# Allegro board Desulfator_new.brd
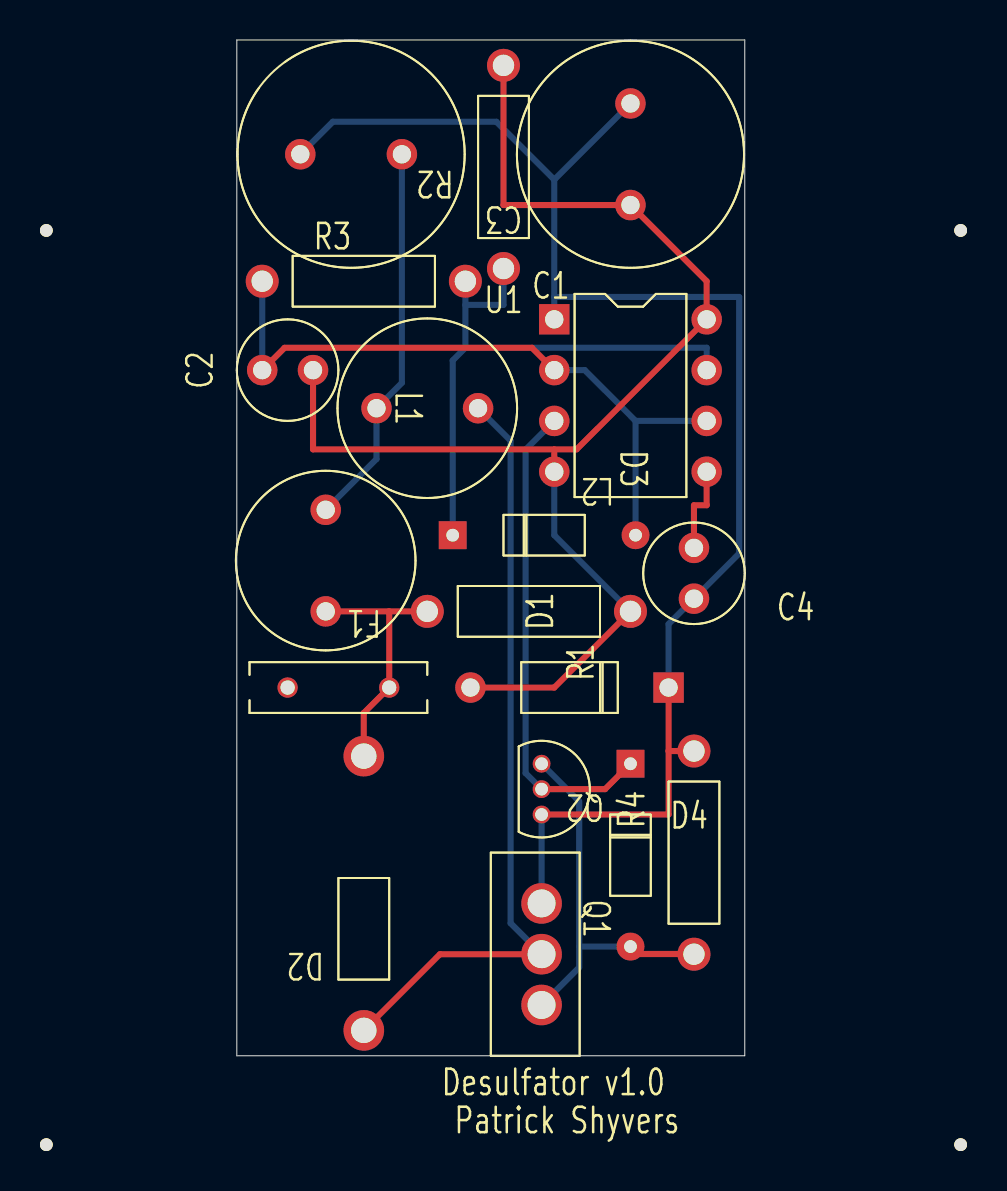
[diagram p0: board, top side]
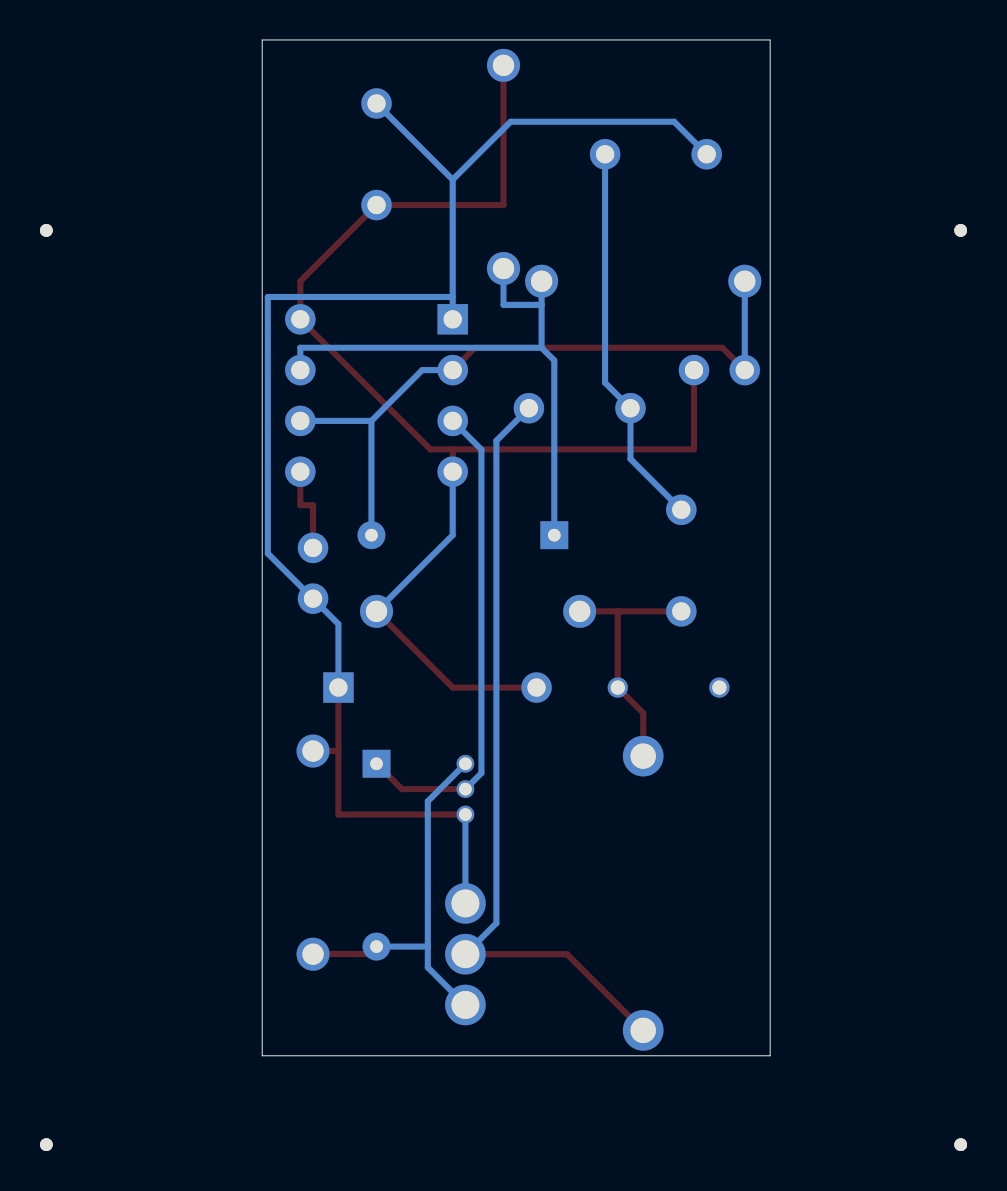
[diagram p1: board, bottom side, seen from below]

Outline 25.4 x 50.8 mm; copper layers: TOP, BOTTOM. Coordinates in mm from the lower left corner of the outline.
Outline path: 0,50.8 0,0 25.4,0 25.4,50.8 0,50.8

## Placement (name value [footprint] x y rotation side)
C1  100uF  [ELECTROLYTIC400]  19.69 42.55 90 top
C2  .0047uF  [CAP196]  3.81 34.29 90 top
C3  100uF  [ELECTROLYTIC400]  8.25 45.08 180 top
C4  0.01uF  [CAP196]  22.86 25.4 180 top
D1  1N4744  [DO41]  21.59 18.41 90 top
D2  FR602  [R6]  6.35 1.27 0 top
D3  1N4148  [DO35]  10.79 26.03 270 top
D4  1N4148  [DO35]  19.69 14.6 180 top
F1  2A  [FUSE200]  8.89 18.41 180 top
L1  1000uH  [IND335]  4.44 27.31 270 top
L2  220uH  [IND335]  12.06 32.38 180 top
NOREF  -  [unnamed]  -9.53 41.27 180 bottom
NOREF#2  -  [unnamed]  36.19 -4.44 180 bottom
NOREF#3  -  [unnamed]  36.19 41.27 180 bottom
NOREF#4  -  [unnamed]  -9.53 -4.44 180 bottom
Q1  IRFZ44N/TO  [TO220AB]  15.24 2.54 270 top
Q2  2N2907  [TO92]  15.24 14.6 0 top
R1  100  [RES400]  19.69 22.22 90 top
R2  15k  [RES400]  13.33 49.53 180 top
R3  270k  [RES400]  11.43 38.74 90 top
R4  15k  [RES400]  22.86 5.08 0 top
U1  NE555/SO  [DIP8_3]  15.88 36.83 0 top

## Library data of the parts
C1-C4 = C: Tolerance: ***; User Part Number: ***
D1 = DIODE ZENER
D2-D4 = DIODE
F1 = FUSE: Tolerance: ***; User Part Number: ***
L1 L2 = INDUCTOR IRON: Tolerance: ***; User Part Number: ***
Q1 = IRFZ44N/TO
Q2 = 2N2907
R1-R4 = R: Tolerance: ***; User Part Number: ***
U1 = NE555/SO_0: Tolerance: ***; User Part Number: ***

## Footprints (pads in the part's own frame, mm; a bottom-side part is the same pattern mirrored in y, then rotated)
CAP196
  round 1.524 hole 0.914: 1(0,0) 2(0,2.54)
DIP8_3
  rect 1.524x1.524 hole 0.914: 1(0,0)
  round 1.524 hole 0.914: 2(0,-2.54) 3(0,-5.08) 4(0,-7.62) 5(7.62,-7.62) 6(7.62,-5.08) 7(7.62,-2.54) 8(7.62,0)
DO35
  rect 1.397x1.397 hole 0.635: 1(0,0)
  round 1.397 hole 0.635: 2(0,9.144)
DO41
  rect 1.524x1.524 hole 0.914: 1(0,0)
  round 1.524 hole 0.914: 2(0,9.906)
ELECTROLYTIC400
  round 1.524 hole 0.914: 1(0,0) 2(5.08,0)
FUSE200
  round 1.016 hole 0.711: 1(1.27,0) 2(6.35,0)
IND335
  round 1.524 hole 0.914: 1(0,0) 2(5.08,0)
R6
  round 2.032 hole 1.27: 1(0,0) 2(0,13.716)
RES400
  round 1.651 hole 1.067: 1(0,0) 2(0,10.16)
TO92
  round 0.889 hole 0.635: 1(0,0) 2(0,-1.27) 3(0,-2.54)
TO220AB
  round 2.032 hole 1.397: 1(0,0) 2(-2.54,0) 3(-5.08,0)
unnamed
  round 0.635 hole 3.175 unplated: (0,0)

## Nets
GND: C1.2 C3.2 C4.2 D1.1(ANODE) Q1.3(S) Q2.3(COLLECTOR) R4.2 U1.1
BATTERY +: F1.2
N22909: C1.1 C2.1 D1.2(CATHODE) R1.1 R2.1 U1.4(RST) U1.8(VCC)
N22953: C2.2 D3.2(K) R3.2 U1.2(TRG) U1.6(THR)
N22993: D3.1(A) R2.2 R3.1 U1.7(DSCHG)
N23058: C4.1 U1.5(CV)
N23106: D2.2(K) F1.1 L1.2 R1.2
N23110: C3.1 L1.1 L2.2
N23204: D4.2(K) Q1.1(G) Q2.1(EMITTER) R4.1
N23235: D4.1(A) Q2.2(BASE) U1.3(OUT)
N23691: D2.1(A) L2.1 Q1.2(D)

## Routing (per net, layer and track width the routed paths; a pad name or vN(x,y) marks a point on that pad's centre or on a via; arc(x,y) is an arc through that point)
GND: length 75.6
  TOP w0.305: Q2.3 21.59,12.06 21.59,15.24 ; 21.59,15.24 D1.1 ; 21.59,15.24 R4.2
  BOTTOM w0.305: 15.88,43.81 15.88,37.95 ; 15.88,43.81 C1.2 ; 15.88,43.81 12.98,46.71 4.8,46.71 C3.2 ; 15.88,37.95 U1.1 ; 15.88,37.95 25.12,37.95 25.12,25.12 C4.2 21.59,21.59 D1.1 ; Q1.3 Q2.3
N22909: length 66.2
  TOP w0.305: R2.1 13.33,42.55 C1.1 23.49,38.74 U1.8 16.99,30.33 15.88,30.33 ; 15.88,30.33 3.81,30.33 C2.1 ; 15.88,30.33 U1.4 ; D1.2 15.88,18.41 R1.1
  BOTTOM w0.305: U1.4 15.88,26.03 R1.1
N22953: length 34.4
  TOP w0.305: U1.2 14.76,35.41 2.39,35.41 C2.2
  BOTTOM w0.305: 19.94,31.75 D3.2 ; 19.94,31.75 17.4,34.29 U1.2 ; 19.94,31.75 U1.6 ; R3.2 C2.2
N22993: length 29.9
  BOTTOM w0.305: 11.43,37.55 13.33,37.55 R2.2 ; 11.43,37.55 R3.1 ; 11.43,37.55 11.43,35.41 ; U1.7 23.49,35.41 11.43,35.41 ; 11.43,35.41 10.79,34.77 D3.1
N23058: length 4.4
  TOP w0.305: U1.5 23.49,27.53 22.86,27.53 C4.1
N23106: length 12.8
  TOP w0.305: 4.44,22.22 7.62,22.22 ; 7.62,22.22 F1.1 6.35,17.14 D2.2 ; 7.62,22.22 9.52,22.22
N23110: length 19.4
  BOTTOM w0.305: L1.1 6.98,29.84 L2.2 8.25,33.65 C3.1
N23204: length 19.5
  TOP w0.305: R4.1 22.85,5.09 20.06,5.09 D4.2
  BOTTOM w0.305: 17.12,5.46 17.12,4.42 Q1.1 ; 17.12,5.46 D4.2 ; 17.12,5.46 17.12,12.73 Q2.1
N23235: length 24.3
  TOP w0.305: Q2.2 18.41,13.33 D4.1
  BOTTOM w0.305: U1.3 14.44,30.31 14.44,14.14 Q2.2
N23691: length 39.1
  TOP w0.305: Q1.2 10.16,5.08 D2.1
  BOTTOM w0.305: Q1.2 13.69,6.63 13.69,30.76 L2.1

## Text on the board
BOTTOM: BOTTOM
Board Geometry/Soldermask Bottom: SMB
Ref Des/Silkscreen Bottom: SSB
TOP: TOP
Board Geometry/Soldermask Top: SMT
Ref Des/Silkscreen Top: SST | Desulfator v1.0 | Patrick Shyvers
DEVICE_TYPE_TOP: FIGURE | SIZE | 60.0 | 52.0 | 42.0 | 38.0 | 35.0 | 28.0 | 20.0 | 125.0 | DRILL CHART: TOP to BOTTOM | ALL UNITS ARE IN MILS | PLATED | NON-PLATED | QTY | 5 | 2 | 8 | 22 | 3 | 4
User.6: MECH
